# EAGLE board VCF-1-Thomas-Henry-TL072.orig (EAGLE 7.6.0)

Size 88.9 x 91.44 mm. Coordinates in mm from the lower left corner, seen from the top.
Outline: 0,0 88.9,0 88.9,91.44 0,91.44 0,0
Copper layers (1*16): Top 0.035mm / dielectric 1.5mm / Bottom 0.035mm
Design rules "default": minimum track width 10mil, minimum drill 24mil, track to track 8mil, track to pad 8mil, pad to pad 8mil, via to via 8mil, smd to smd 8mil, copper to edge 40mil, drill to drill 8mil, minimum pad ring 10mil, minimum via ring 8mil, stop-mask expansion 4mil, vias tented up to drill 0mil, thermal gap 10mil

## Footprints (pad centres in the part's own frame; a part is rotated, then mirrored left to right if it is on the bottom)
C050-020X036 = drill 0.8: 1 -2.54,0; 2 2.54,0
C050-020X044/V = drill 0.8: 1 0,2.54; 2 0,-2.54
DIL08 = drill 0.8 pad 1.27: 1 -3.81,-3.81; 2 -1.27,-3.81; 3 1.27,-3.81; 4 3.81,-3.81; 5 3.81,3.81; 6 1.27,3.81; 7 -1.27,3.81; 8 -3.81,3.81
DIL16 = drill 0.8 long: 1 -3.81,8.89; 2 -3.81,6.35; 3 -3.81,3.81; 4 -3.81,1.27; 5 -3.81,-1.27; 6 -3.81,-3.81; 7 -3.81,-6.35; 8 -3.81,-8.89; 9 3.81,-8.89; 10 3.81,-6.35; 11 3.81,-3.81; 12 3.81,-1.27; 13 3.81,1.27; 14 3.81,3.81; 15 3.81,6.35; 16 3.81,8.89
SPAD-+ = drill 1 pad 1.778: 1 0,-1.27; 2 0,1.27
0204/10-V = drill 0.8: 1 0,5.08; 2 0,-5.08
0204/10 = drill 0.8: 1 -5.08,0; 2 5.08,0
POT-V = drill 1.016 pad 1.93: A -2.54,-2.54; E 2.54,-2.54; S 0,2.54
POT = drill 1 pad 1.93: 1 -2.54,0; 2 0,0; 3 2.54,0
TO92 = drill 0.8 octagon: 1 0,2.54; 2 0,0; 3 0,-2.54

## Placement (x,y rotation side)
C1  10pF  [C050-020X036]  88.9,35.56 0 top
C2  10pF  [C050-020X036]  132.08,33.02 0 top  (outside the outline)
C3  330pF  [C050-020X036]  121.92,33.02 0 top  (outside the outline)
C4  330pF  [C050-020X036]  165.1,27.94 0 top  (outside the outline)
C5  1nF  [C050-020X036]  20.32,17.78 0 top
C14  0.22uF  [C050-020X044/V]  58.42,35.56 0 top
IC1  TL072P  [DIL08]  -17.78,-16.51 0 top  (outside the outline)
IC2  TL072P  [DIL08]  106.68,27.94 0 top  (outside the outline)
IC3  LM13600  [DIL16]  127,22.86 0 top  (outside the outline)
IC4  TL072P  [DIL08]  7.62,41.91 270 top
J1  SPAD+--+  [SPAD-+]  -20.32,49.53 0 top  (outside the outline)
J2  SPAD+--+  [SPAD-+]  -20.32,39.37 0 top  (outside the outline)
J3  SPAD+--+  [SPAD-+]  53.34,41.91 0 top
J4  SPAD+--+  [SPAD-+]  81.28,19.05 0 top
J5  SPAD+--+  [SPAD-+]  127,13.97 0 top  (outside the outline)
J6  SPAD+--+  [SPAD-+]  170.18,8.89 0 top  (outside the outline)
R1  22  [0204/10-V]  93.98,25.4 0 top  (outside the outline)
R2  22  [0204/10-V]  96.52,0 0 top  (outside the outline)
R3  22  [0204/10-V]  137.16,20.32 0 top  (outside the outline)
R4  22  [0204/10-V]  142.24,-5.08 0 top  (outside the outline)
R5  47  [0204/10]  132.08,48.26 0 top  (outside the outline)
R6  100  [POT-V]  20.32,43.18 0 top
R7  390  [0204/10-V]  20.32,35.56 0 top
R8  1k  [0204/10-V]  83.82,25.4 0 top
R9  1k  [0204/10-V]  127,20.32 0 top  (outside the outline)
R10  1k  [0204/10-V]  172.72,15.24 0 top  (outside the outline)
R12  5.6k  [0204/10-V]  27.94,12.7 0 top
R13  11k  [0204/10]  88.9,27.94 0 top
R14  11k  [0204/10]  132.08,25.4 0 top  (outside the outline)
R15  15k  [0204/10-V]  111.76,33.02 0 top  (outside the outline)
R16  15k  [0204/10-V]  154.94,27.94 0 top  (outside the outline)
R17  27k  [0204/10]  78.74,43.18 0 top
R18  33k  [0204/10]  -5.08,35.56 0 top
R19  100k  [0204/10]  -5.08,50.8 0 top
R20  100k  [0204/10]  -5.08,22.86 0 top
R21  100k  [0204/10]  7.62,10.16 0 top
R22  100k  [0204/10]  66.04,30.48 0 top
R23  100k  [0204/10]  78.74,50.8 0 top
R24  100k  [0204/10]  78.74,35.56 0 top
R25  100k  [0204/10]  93.98,5.08 0 top
R26  100k  [0204/10]  137.16,0 0 top  (outside the outline)
R27  100  [POT-V]  86.36,5.08 0 top
R28  100  [POT-V]  132.08,0 0 top  (outside the outline)
R29  100k  [POT]  -15.24,34.29 0 top  (outside the outline)
R30  100k  [POT]  -20.32,22.86 0 top  (outside the outline)
R31  100k  [POT]  -20.32,5.08 0 top  (outside the outline)
R32  [POT]  60.96,30.48 0 top
R33  100k  [POT]  127,43.18 0 top  (outside the outline)
R34  3.3M  [0204/10]  -5.08,5.08 0 top
T1  2N3906  [TO92]  22.86,22.86 90 top
T2  2N3906  [TO92]  30.48,22.86 90 top

## Library data of the parts
C1-C5 C14 = c
IC1-IC4 = ic
J1-J6 = pad
R1-R10 R12-R34 = r
T1 T2 = t

## Nets
GND: IC1.3 IC1.5 IC2.3 IC2.5 IC4.3 J1.1 J2.1 J3.1 J4.1 J5.1 J6.1 R1.2 R2.2 R3.2 R4.2 R5.2 R7.2 R29.1 R32.3 T1.2
IABC: R15.1 R16.1 T2.3
N$1: J1.2 R19.1
N$2: R18.1 R29.2
N$3: J2.2 R29.3
N$4: R20.1 R30.2
N$5: R31.2 R34.1
N$6: IC1.2 R18.2 R19.2 R20.2 R34.2
N$7: IC1.1 R6.A
N$8: R6.E R7.1
N$9: R12.1 T1.3 T2.1
N$10: C5.2 IC1.7 R12.2
N$11: C5.1 IC1.6 R21.2 T1.1
N$12: R6.S T2.2
N$13: R22.1 R32.2
N$14: IC2.2 R17.1 R22.2 R23.1 R24.1
N$15: C1.1 IC2.1 R8.1 R13.1 R24.2
N$16: C1.2 IC3.4 R1.1 R13.2
N$17: J4.2 R8.2
N$18: IC3.1 R15.2
N$19: C3.1 IC2.6 IC3.5
N$20: C2.1 C3.2 IC2.7 R9.1 R14.1 R33.1
N$21: J5.2 R9.2
N$22: C2.2 IC3.13 R3.1 R14.2
N$23: IC3.14
N$24: R25.1 R27.S
N$25: IC3.3 R2.1 R25.2
N$26: R26.1 R28.S
N$27: R4.1 R26.2
N$28: IC3.16 R16.2
N$29: C4.1 IC3.12 IC4.2
N$30: C4.2 IC4.1 R10.1 R23.2
N$31: J6.2 R10.2
N$32: R17.2 R33.2
N$33: R5.1 R33.3
N$34: C14.1 J3.2
N$35: C14.2 R32.1
V+: IC3.11
V-: IC3.6
VCC: IC1.8 IC2.8 IC4.8 R27.A R28.A R30.1 R31.1
VEE: IC1.4 IC2.4 IC4.4 R21.1 R27.E R28.E R30.3 R31.3

## Tracks (layer width: path | path; a pad name or v marks a point on that pad's centre or on a via)
GND  (19 unrouted)
IABC  (2 unrouted)
N$1  (1 unrouted)
N$2  (1 unrouted)
N$3  (1 unrouted)
N$4  (1 unrouted)
N$5  (1 unrouted)
N$6  (4 unrouted)
N$7  (1 unrouted)
N$8  (1 unrouted)
N$9  (2 unrouted)
N$10  (2 unrouted)
N$11  (3 unrouted)
N$12  (1 unrouted)
N$14  (4 unrouted)
N$15  (4 unrouted)
N$16  (3 unrouted)
N$17  (1 unrouted)
N$18  (1 unrouted)
N$19  (2 unrouted)
N$20  (4 unrouted)
N$22  (2 unrouted)
N$24  (1 unrouted)
N$25  (2 unrouted)
N$26  (1 unrouted)
N$28  (1 unrouted)
N$29  (2 unrouted)
N$30  (3 unrouted)
N$31  (1 unrouted)
N$32  (1 unrouted)
N$33  (1 unrouted)
N$34  (1 unrouted)
N$35  (1 unrouted)
VCC  (6 unrouted)
VEE  (7 unrouted)